# Altium PCB SFCslaver.PcbDoc (part 1 of 6)
Units mm, origin at the board's own origin, x right, y up, seen from the top; angles counter-clockwise.
Board outline 149.66 x 75.74 mm, 2 copper layers (Top Layer, Bottom Layer); 284 components, 212 nets, 830 pads, 310 vias.
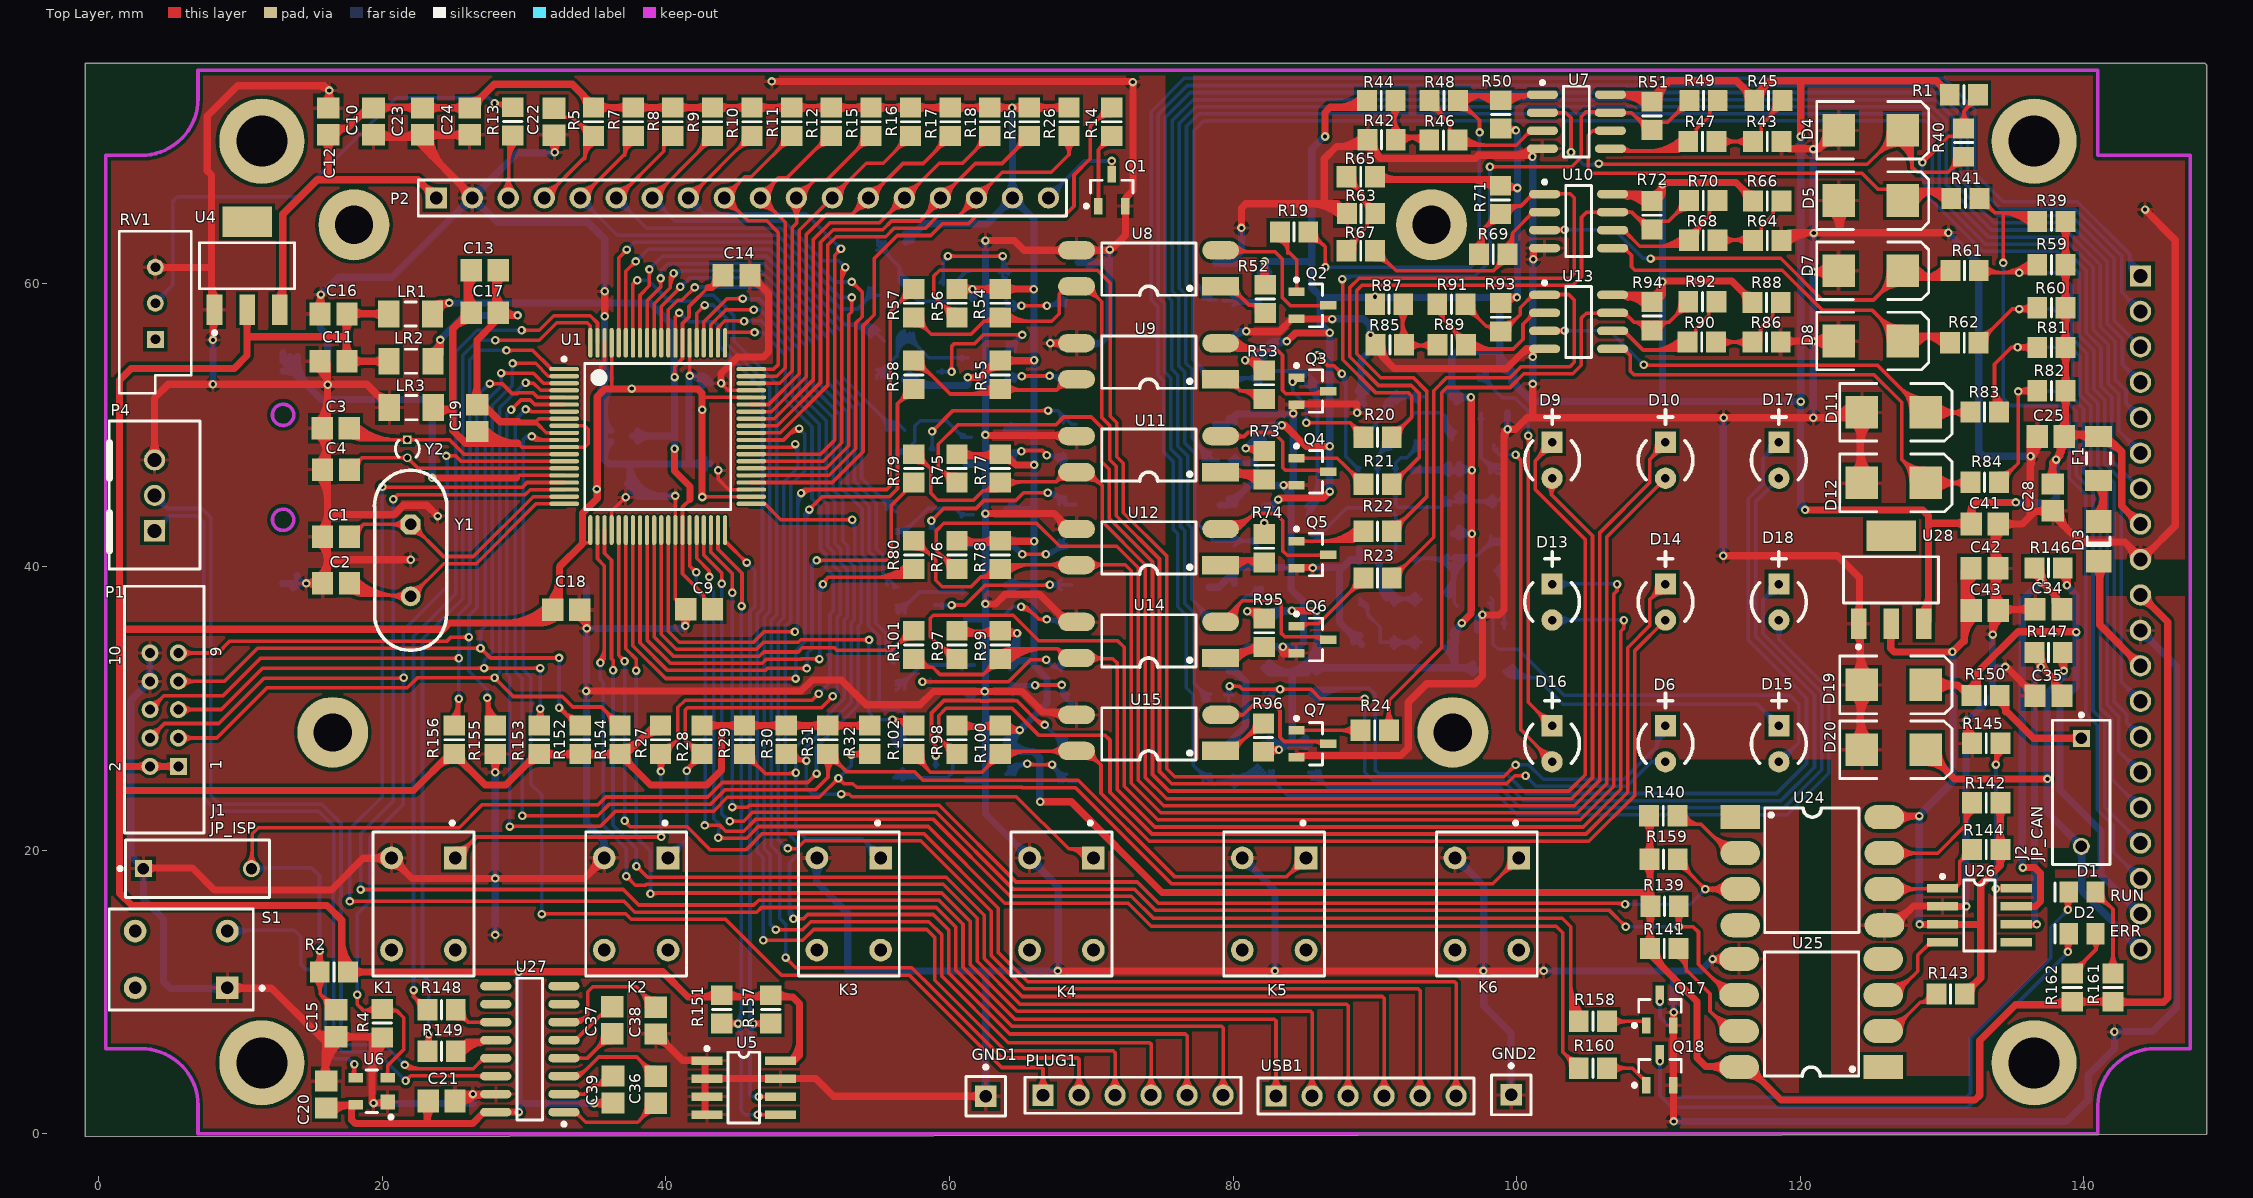
[diagram p0: Top Layer view]
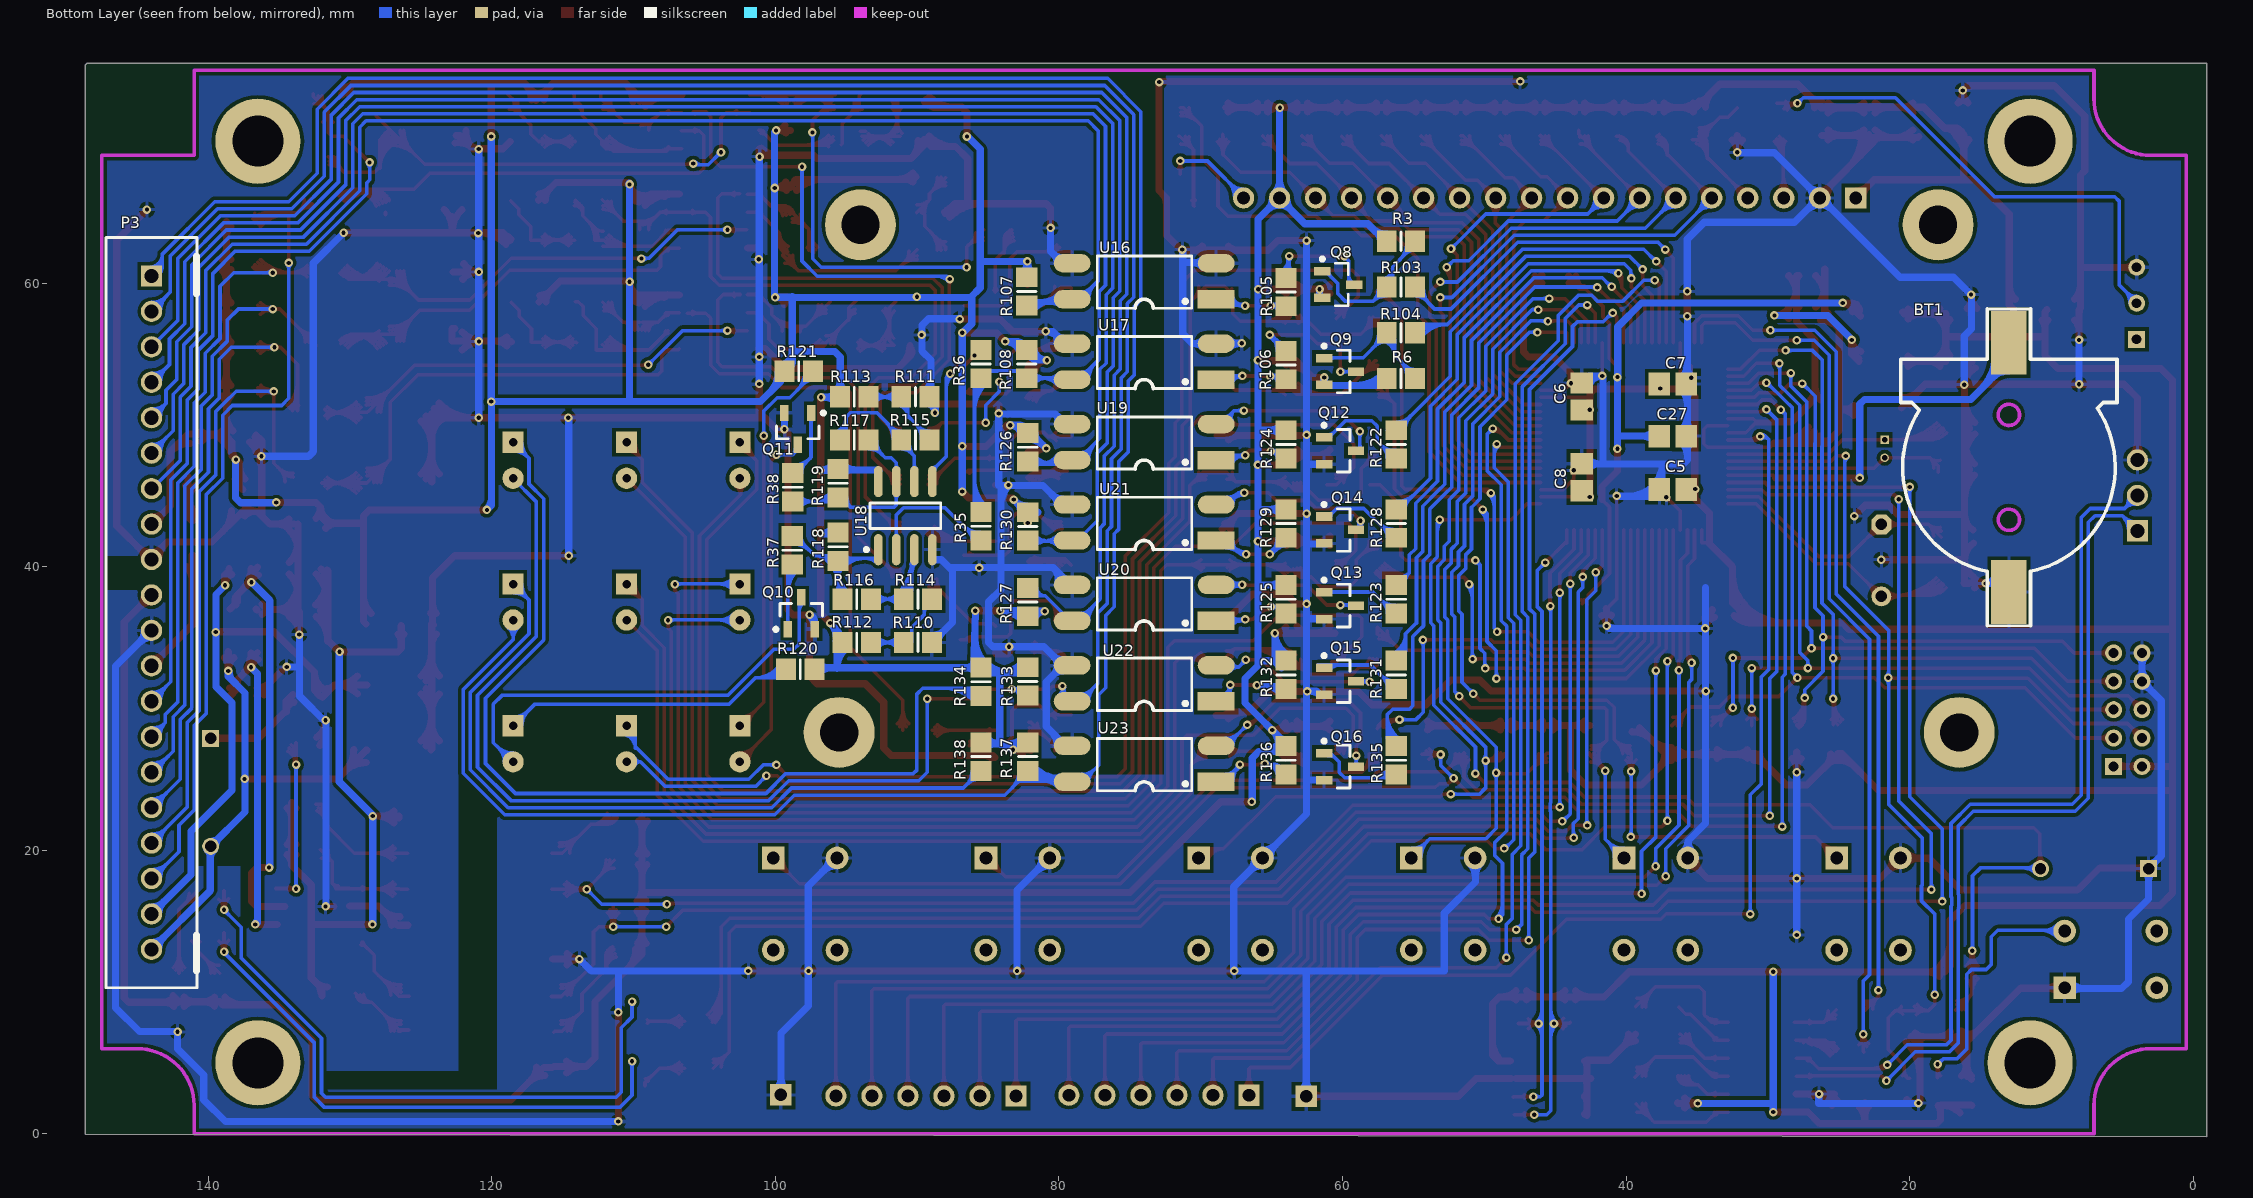
[diagram p1: Bottom Layer view, seen from below]

## Layer stack, top to bottom
Top Solder: solder mask 0.0102, Solder Resist, Dk 3.5
Top Layer: signal copper 0.0356
Dielectric1: dielectric 0.32, FR-4, Dk 4.8
Bottom Layer: signal copper 0.0356
Bottom Solder: solder mask 0.0102, Solder Resist, Dk 3.5

## Board outline
-0.968,-0.229 -0.968,75.514 148.537,75.514 148.588,75.463 148.689,75.362 148.689,-0.051

## Design rules (kind name [scope] priority, off if disabled: settings)
Clearance Clearance_U1 [(InComponent('U1'))] p1: gap=0.127
Clearance [All] p2: gap=0.245
HoleSize [All] p1: absolutevalues=TRUE maxlimit=5.08 minlimit=0.025 maxpercent=80.000 minpercent=20.000
PolygonConnect [All] p1: connectstyle=Relief reliefconductorwidth=0.254 reliefentries=4 polygonreliefangle="90 Angle" airgapwidth=0.254
RoutingVias [All] p1: holewidth=0.711 width=1.27 viastyle="Through Hole" minholewidth=0.711 minwidth=1.27 maxholewidth=0.711 maxwidth=1.27
SilkToSolderMaskClearance SilkscreenOverComponentPads [IsPad] p1: minsilkscreentomaskgap=0.254 clearancetoexposedcopper=TRUE
SolderMaskExpansion [All] p1: expansion=0.102
Width Width_NETJ2 [InNet('NetJ2_1')or InNet('NetJ2_2')] p1: maxlimit=0.508 minlimit=0.254 preferedwidth=0.508
Width Width_NETC35_2 [InNet('NetC35_2')] p2: maxlimit=0.508 minlimit=0.254 preferedwidth=0.508
Width Width_NETC34_2 [InNet('NetC34_2')] p3: maxlimit=0.508 minlimit=0.254 preferedwidth=0.508
Width Width_CANL_PORT1 [InNet('CANL_PORT1')] p4: maxlimit=0.508 minlimit=0.254 preferedwidth=0.508
Width Width_CANH_PORT1 [InNet('CANH_PORT1')] p5: maxlimit=0.508 minlimit=0.254 preferedwidth=0.508
Width Width_VREG [InNet('VREG')] p6: maxlimit=0.508 minlimit=0.254 preferedwidth=0.508
Width Width_VREFP [InNet('VREFP')] p7: maxlimit=0.508 minlimit=0.254 preferedwidth=0.508
Width Width_VDDA [InNet('VDDA')] p8: maxlimit=0.508 minlimit=0.254 preferedwidth=0.508
Width Width_AGND [InNet('AGND')] p9: maxlimit=0.508 minlimit=0.254 preferedwidth=0.508
Width Width_NetQ20_1 [InNet('NetQ20_1')] p10: maxlimit=0.508 minlimit=0.254 preferedwidth=0.508
Width Width_VBAT [InNet('VBAT')] p11: maxlimit=0.508 minlimit=0.254 preferedwidth=0.508
Width Width_NetD22_1 [InNet('NetD22_1')] p12: maxlimit=0.508 minlimit=0.254 preferedwidth=0.508
Width Width_NetD21_1 [InNet('NetD21_1')] p13: maxlimit=0.508 minlimit=0.254 preferedwidth=0.508
Width Width_BT1 [InNet('NetBT1_1')] p14: maxlimit=0.508 minlimit=0.254 preferedwidth=0.508
Width Width_Plus_Power [InNet('PLUS_POWER_PORT')] p15: maxlimit=0.508 minlimit=0.254 preferedwidth=0.508
Width Width_GNDA [InNet('GNDA')] p16: maxlimit=0.508 minlimit=0.254 preferedwidth=0.508
Width Width_GND [InNet('GND')] p17: maxlimit=0.508 minlimit=0.254 preferedwidth=0.508
Width Width_1V8 [InNet('1.8V')] p18: maxlimit=0.508 minlimit=0.254 preferedwidth=0.508
Width Width_3V3 [InNet('3.3V')] p19: maxlimit=0.508 minlimit=0.254 preferedwidth=0.508
Width Width_5VA [InNet('5VA')] p20: maxlimit=0.508 minlimit=0.254 preferedwidth=0.508
Width Width_5V [InNet('5V')] p21: maxlimit=0.508 minlimit=0.254 preferedwidth=0.508
Width Width_12V [InNet('12V') or InNet('NETD3_1')] p22: maxlimit=0.508 minlimit=0.254 preferedwidth=0.508
Width [All] p23: maxlimit=0.254 minlimit=0.254 preferedwidth=0.254
27 further rules are at their usual default settings.

## Classes and differential pairs
component class xcomm: C34 C35 C36 C37 C38 C39 C41 C42 C43 C74 C75 D19 D20 J2 P1 P3 P4 R139 R140 R141 R142 R143 R144 R145 R146 R147 R148 R149 R150 R152 R153 R154 R155 R156 R159 U24 U25 U26 U27 U28
component class output3: D1 D2 D17 D18 Q15 Q16 Q17 Q18 R125 R131 R132 R133 R134 R136 R137 R138 R158 R160 R161 R162 U22 U23
component class output2: Q12 Q13 Q14 R112 R123 R124 R125 R126 R127 R128 R129 R130 U19 U20 U21
component class output1: D15 D16 Q8 Q9 Q10 Q11 R3 R6 R35 R36 R37 R38 R96 R103 R104 R105 R107 R108 R110 R111 R112 R113 R114 R115 R116 R117 R118 R119 R120 R121 U16 U17 U18
component class input3: D11 D12 D13 D14 Q6 Q7 R23 R24 R72 R75 R81 R83 R84 R86 R87 R88 R89 R90 R91 R92 R93 R94 R95 R96 R97 R98 R99 R100 R101 R102 U13 U14 U15
component class input2: D7 D8 D9 D10 Q4 Q5 R21 R22 R59 R60 R61 R62 R63 R64 R65 R66 R67 R68 R69 R70 R71 R72 R73 R74 R75 R76 R77 R78 R79 R80 U10 U11 U12
component class input1: C25 C28 D3 D4 D5 D6 F1 Q2 Q3 R1 R19 R20 R29 R30 R31 R32 R38 R43 R44 R45 R46 R47 R49 R50 R51 R52 R53 R54 R55 R56 R57 R58 U7 U8 U9
component class cpu: BT1 C1 C2 C3 C4 C5 C6 C7 C8 C9 C10 C11 C12 C13 C14 C15 C16 C17 C18 C19 C20 C21 C22 C23 C24 C27 GND1 GND2 J1 K1 K2 K3 K4 K5 K6 LR1 LR2 LR3 P2 PLUG1 Q1 R2 R4 R5 R7 R8 R9 R10 R11 R12 R13 R14 R15 R16 R17 R18 R25 R26 R27 R28 R29 R30 R31 R32 R151 R157 RV1 S1 U1 U4 U5 U6 USB1 Y1 Y2

## Components (designator, comment, footprint, x,y, rotation, side; value= is the part's Value field where it differs from the comment)
BT1 "CR1220" BAT-CR1220A 13,47 r180 bottom locked
C1 "20pF" CAPC2012M 16.739,42.102 r180 top
C2 "20pF" CAPC2012M 16.739,38.829 r180 top
C3 "15pF" CAPC2012M 16.713,49.759 r180 top
C4 "15pF" CAPC2012M 16.739,46.838 r180 top
C5 "0.01uF" CAPC2012M 36.703,45.441 r180 bottom
C6 "0.01uF" CAPC2012M 43.129,51.994 r270 bottom
C7 "0.01uF" CAPC2012M 36.703,52.883 r0 bottom
C8 "0.01uF" CAPC2012M 43.129,46.304 r270 bottom
C9 "0.01uF" CAPC2012M 42.342,36.982 r0 top
C10 "10uF" CAPC2012M 19.38,71.399 r90 top
C11 "10uF" CAPC2012M 16.561,54.483 r0 top
C12 "0.1uF" CAPC2012M 16.18,71.399 r270 top
C13 "0.01uF" CAPC2012M 27.229,60.909 r0 top
C14 "0.01uF" CAPC2012M 44.983,60.554 r180 top
C15 "0.1uF" CAPC2012M 16.739,7.798 r270 top
C16 "0.1uF" CAPC2012M 16.561,57.81 r0 top
C17 "0.1uF" CAPC2012M 27.229,57.912 r0 top
C18 "0.01uF" CAPC2012M 32.969,36.957 r180 top
C19 "0.01uF" CAPC2012M 26.695,50.47 r90 top
C20 "0.1uF" CAPC2012M 16.053,2.769 r270 top
C21 "10uF" CAPC2012M 24.181,2.311 r180 top
C22 "0.1uF" CAPC2012M 32.107,71.378 r270 top
C23 "10uF" CAPC2012M 22.835,71.399 r90 top
C24 "0.1uF" CAPC2012M 26.162,71.399 r270 top
C25 "0.1uF" CAPC2012M 137.67,49.179 r0 top
C27 "0.01uF" CAPC2012M 36.703,49.2 r0 bottom
C28 "10uF" CAPC2012M 137.82,44.882 r90 top
C34 "20pF" CAPC2012M 137.517,36.987 r0 top
C35 "20pF" CAPC2012M 137.517,30.891 r0 top
C36 "0.1uF" CAPC2012M 39.294,3.099 r270 top
C37 "0.1uF" CAPC2012M 36.216,8.003 r270 top
C38 "0.1uF" CAPC2012M 39.29,7.977 r90 top
C39 "0.1uF" CAPC2012M 36.271,3.124 r270 top
C41 "0.1uF" CAPC2012M 133.01,43.002 r180 top
C42 "0.1uF" CAPC2012M 132.994,39.878 r180 top
C43 "10uF" CAPC2012M 133.02,36.906 r180 top
D1 "RUN" CD2012-0805 139.878,17.043 r180 top
D2 "ERR" CD2012-0805 139.878,14.097 r180 top
D3 "LL4148" CD3216-1206 141.046,41.783 r270 top
D4 "SMB12CA" SMB 124.97,70.769 r0 top
D5 "SMB12CA" SMB 124.97,65.816 r0 top
D6 "Green LED" LED254A 110.5,27.5 r270 top locked
D7 "SMB12CA" SMB 124.97,60.863 r0 top
D8 "SMB12CA" SMB 124.97,55.91 r0 top
D9 "Green LED" LED254A 102.5,47.5 r270 top locked
D10 "Green LED" LED254A 110.5,47.5 r270 top locked
D11 "SMB12CA" SMB 126.595,50.88 r0 top
D12 "SMB12CA" SMB 126.595,45.902 r0 top
D13 "Green LED" LED254A 102.5,37.5 r270 top locked
D14 "Green LED" LED254A 110.5,37.5 r270 top locked
D15 "Green LED" LED254A 118.5,27.5 r270 top locked
D16 "Red LED" LED254A 102.5,27.5 r270 top locked
D17 "Red LED" LED254A 118.5,47.5 r270 top locked
D18 "Red LED" LED254A 118.5,37.5 r270 top locked
D19 "SMB5.0CA" SMB 126.595,31.653 r0 top
D20 "SMB5.0CA" SMB 126.595,27.081 r0 top
F1 "50mA/60V" RESC3216M 141.046,47.625 r90 top
GND1 "Plug" PIN1 62.56,2.642 r0 top
GND2 "Plug" PIN1 99.619,2.743 r0 top
J1 "JP_ISP" DS-01 6.96,18.694 r0 top
J2 "JP_CAN" DS-01 139.827,24.079 r270 top
K1 "SW-PB" PBST-4S 22.9,16.2 r270 top locked
K2 "SW-PB" PBST-4S 37.9,16.2 r270 top locked
K3 "SW-PB" PBST-4S 52.9,16.2 r270 top locked
K4 "SW-PB" PBST-4S 67.9,16.2 r270 top locked
K5 "SW-PB" PBST-4S 82.9,16.2 r270 top locked
K6 "SW-PB" PBST-4S 97.9,16.2 r270 top locked
LR1 "CBG321609U102" RESC3216M 21.996,57.81 r0 top
LR2 "CBG321609U102" RESC3216M 22.022,54.483 r0 top
LR3 "CBG321609U102" RESC3216M 22.047,51.206 r0 top
P1 "Header 5X2" HDR2X5M 5.613,25.908 r90 top
P2 "Header 18" HDR1X18 23.8,66 r0 top locked
P3 "Header 20" HDR1X20-2.5 144,60.5 r270 bottom locked
P4 "Header 3" HDR1X3-2.5 3.937,42.52 r90 top
PLUG1 "Header 6" HDR1X6 66.599,2.718 r0 top
Q1 "SS8050" SOT-23_N 71.45,66.548 r90 top
Q2 "SS8050" SOT-23_N 85.598,58.42 r0 top
Q3 "SS8050" SOT-23_N 85.598,52.379 r0 top
Q4 "SS8050" SOT-23_N 85.598,46.697 r0 top
Q5 "SS8050" SOT-23_N 85.598,40.847 r0 top
Q6 "SS8050" SOT-23_N 85.598,34.853 r0 top
Q7 "SS8050" SOT-23_N 85.598,27.494 r0 top
Q8 "SS8550" SOT-23_N 60.3,59.893 r180 bottom
Q9 "SS8550" SOT-23_N 60.174,53.758 r180 bottom
Q10 "SS8050" SOT-23_N 98.171,36.703 r90 bottom
Q11 "SS8050" SOT-23_N 98.421,49.712 r270 bottom
Q12 "SS8050" SOT-23_N 60.174,48.17 r180 bottom
Q13 "SS8050" SOT-23_N 60.174,37.248 r180 bottom
Q14 "SS8050" SOT-23_N 60.174,42.582 r180 bottom
Q15 "SS8050" SOT-23_N 60.174,31.914 r180 bottom
Q16 "SS8050" SOT-23_N 60.174,25.894 r180 bottom
Q17 "SS8050" SOT-23_N 110.109,8.763 r90 top
Q18 "SS8050" SOT-23_N 110.109,4.547 r90 top
R1 "100K" RESC2012M 131.547,73.279 r180 top
R2 "10K" RESC2012M 16.586,11.405 r180 top
R3 "3K" RESC2012M 55.88,62.941 r180 bottom
R4 "100K" RESC2012M 19.99,7.798 r270 top
R5 "10K" RESC2012M 34.901,71.378 r270 top
R6 "3K" RESC2012M 55.88,53.264 r180 bottom
R7 "10K" RESC2012M 37.695,71.378 r270 top
R8 "10K" RESC2012M 40.489,71.378 r270 top
R9 "10K" RESC2012M 43.283,71.378 r270 top
R10 "10K" RESC2012M 46.077,71.378 r270 top
R11 "10K" RESC2012M 48.871,71.378 r270 top
R12 "10K" RESC2012M 51.665,71.378 r270 top
R13 "3K" RESC2012M 29.208,71.399 r270 top
R14 "1K" RESC2012M 71.45,71.374 r270 top
R15 "10K" RESC2012M 54.459,71.378 r270 top
R16 "10K" RESC2012M 57.253,71.378 r270 top
R17 "10K" RESC2012M 60.047,71.378 r270 top
R18 "10K" RESC2012M 62.841,71.378 r270 top
R19 "1K" RESC2012M 84.303,63.602 r180 top
R20 "1K" RESC2012M 90.195,49.117 r180 top
R21 "1K" RESC2012M 90.195,45.809 r180 top
R22 "1K" RESC2012M 90.195,42.501 r180 top
R23 "1K" RESC2012M 90.195,39.192 r180 top
R24 "1K" RESC2012M 89.992,28.448 r180 top
R25 "10K" RESC2012M 65.635,71.378 r270 top
R26 "10K" RESC2012M 68.429,71.378 r270 top
R27 "10K" RESC2012M 39.624,27.792 r90 top
R28 "10K" RESC2012M 42.545,27.792 r90 top
R29 "10K" RESC2012M 45.542,27.792 r90 top
R30 "10K" RESC2012M 48.489,27.792 r90 top
R31 "10K" RESC2012M 51.41,27.792 r90 top
R32 "10K" RESC2012M 54.381,27.792 r90 top
R35 "51K" RESC2012M 85.496,42.85 r270 bottom
R36 "51K" RESC2012M 85.496,54.28 r270 bottom (schematic designator R46)
R37 "10K" RESC2012M 98.806,41.148 r90 bottom
R38 "10K" RESC2012M 98.781,45.593 r90 bottom
R39 "100K" RESC2012M 137.721,64.342 r0 top
R40 "10K" RESC2012M 131.521,69.901 r90 top
R41 "10K" RESC2012M 131.65,65.968 r0 top
R42 "100K" RESC2012M 90.475,70.104 r0 top
R43 "100K" RESC2012M 117.68,69.981 r180 top
R44 "51K" RESC2012M 90.449,72.873 r180 top
R45 "51K" RESC2012M 117.756,72.877 r180 top
R46 "100K" RESC2012M 94.841,70.079 r0 top
R47 "100K" RESC2012M 113.108,69.981 r180 top
R48 "1M" RESC2012M 94.867,72.873 r180 top
R49 "1M" RESC2012M 113.184,72.877 r180 top
R50 "4.7K" RESC2012M 98.884,71.886 r90 top
R51 "4.7K" RESC2012M 109.548,71.78 r90 top
R52 "1K" RESC2012M 82.271,58.877 r270 top
R53 "1K" RESC2012M 82.194,52.829 r270 top
R54 "4.7K" RESC2012M 63.578,58.577 r90 top
R55 "4.7K" RESC2012M 63.578,53.522 r90 top
R56 "3K" RESC2012M 60.53,58.577 r270 top
R57 "470R" RESC2012M 57.482,58.577 r90 top
R58 "470R" RESC2012M 57.482,53.522 r270 top
R59 "100K" RESC2012M 137.721,61.294 r0 top
R60 "100K" RESC2012M 137.721,58.246 r0 top
R61 "10K" RESC2012M 131.597,60.884 r0 top
R62 "10K" RESC2012M 131.572,55.778 r0 top
R63 "100K" RESC2012M 89.027,64.897 r0 top
R64 "100K" RESC2012M 117.68,62.996 r180 top
R65 "51K" RESC2012M 89.002,67.488 r0 top
R66 "51K" RESC2012M 117.68,65.79 r180 top
R67 "100K" RESC2012M 89.002,62.281 r180 top
R68 "100K" RESC2012M 113.159,63.022 r180 top
R69 "1M" RESC2012M 98.349,62.027 r180 top
R70 "1M" RESC2012M 113.159,65.816 r180 top
R71 "4.7K" RESC2012M 98.857,65.862 r270 top
R72 "4.7K" RESC2012M 109.552,64.774 r90 top
R73 "1K" RESC2012M 82.194,47.147 r90 top
R74 "1K" RESC2012M 82.194,41.297 r270 top
R75 "3K" RESC2012M 60.53,46.918 r270 top
R76 "3K" RESC2012M 60.53,40.822 r270 top
R77 "4.7K" RESC2012M 63.578,46.918 r90 top
R78 "4.7K" RESC2012M 63.578,40.822 r90 top
R79 "470R" RESC2012M 57.482,46.918 r270 top
R80 "470R" RESC2012M 57.482,40.822 r270 top
R81 "100K" RESC2012M 137.721,55.452 r0 top
R82 "100K" RESC2012M 137.721,52.404 r0 top
R83 "10K" RESC2012M 133.01,50.902 r0 top
R84 "10K" RESC2012M 133.01,45.949 r0 top
R85 "100K" RESC2012M 91.059,55.651 r0 top
R86 "100K" RESC2012M 117.629,55.833 r180 top
R87 "51K" RESC2012M 91.008,58.496 r180 top
R88 "51K" RESC2012M 117.629,58.627 r180 top
R89 "100K" RESC2012M 95.428,55.651 r180 top
R90 "100K" RESC2012M 113.057,55.833 r180 top
R91 "1M" RESC2012M 95.402,58.496 r0 top
R92 "1M" RESC2012M 113.108,58.678 r180 top
R93 "4.7K" RESC2012M 98.884,57.586 r270 top
R94 "4.7K" RESC2012M 109.552,57.662 r90 top
R95 "1K" RESC2012M 82.194,35.328 r270 top
R96 "1K" RESC2012M 82.144,27.94 r90 top
R97 "3K" RESC2012M 60.53,34.472 r270 top
R98 "3K" RESC2012M 60.53,27.792 r270 top
R99 "4.7K" RESC2012M 63.578,34.472 r90 top
R100 "4.7K" RESC2012M 63.578,27.792 r90 top
R101 "470R" RESC2012M 57.482,34.472 r90 top
R102 "470R" RESC2012M 57.482,27.792 r90 top
R103 "10K" RESC2012M 55.88,59.715 r0 bottom
R104 "10K" RESC2012M 55.88,56.49 r0 bottom
R105 "470R" RESC2012M 63.984,59.364 r270 bottom
R106 "470R" RESC2012M 63.984,54.208 r270 bottom
R107 "10K" RESC2012M 82.271,59.411 r90 bottom
R108 "10K" RESC2012M 82.271,54.28 r90 bottom
R110 "100K" RESC2012M 89.943,34.65 r0 bottom
R111 "100K" RESC2012M 90.121,51.973 r0 bottom
R112 "51K" RESC2012M 94.261,34.65 r0 bottom
R113 "51K" RESC2012M 94.439,51.973 r0 bottom
R114 "100K" RESC2012M 89.943,37.698 r180 bottom
R115 "100K" RESC2012M 90.121,48.925 r180 bottom
R116 "1M" RESC2012M 94.261,37.698 r0 bottom
R117 "1M" RESC2012M 94.439,48.925 r180 bottom
R118 "4.7K" RESC2012M 95.58,41.402 r270 bottom
R119 "4.7K" RESC2012M 95.58,45.872 r270 bottom
R120 "10K" RESC2012M 98.247,32.766 r180 bottom
R121 "10K" RESC2012M 98.349,53.772 r0 bottom
R122 "1K" RESC2012M 56.212,48.62 r270 bottom
R123 "1K" RESC2012M 56.212,37.698 r270 bottom
R124 "470R" RESC2012M 63.984,48.62 r270 bottom
R125 "470R" RESC2012M 63.984,37.698 r270 bottom
R126 "10K" RESC2012M 82.194,48.417 r90 bottom
R127 "10K" RESC2012M 82.194,37.495 r270 bottom
R128 "1K" RESC2012M 56.212,43.032 r270 bottom
R129 "470R" RESC2012M 63.984,43.032 r270 bottom
R130 "10K" RESC2012M 82.194,42.829 r90 bottom
R131 "1K" RESC2012M 56.212,32.364 r270 bottom
R132 "470R" RESC2012M 63.984,32.364 r270 bottom
R133 "10K" RESC2012M 82.194,31.902 r90 bottom
R134 "10K" RESC2012M 85.496,31.881 r270 bottom
R135 "1K" RESC2012M 56.212,26.344 r270 bottom
R136 "470R" RESC2012M 63.984,26.344 r270 bottom
R137 "10K" RESC2012M 82.194,26.594 r90 bottom
R138 "10K" RESC2012M 85.496,26.594 r270 bottom
R139 "4.7K" RESC2012M 110.439,16.053 r0 top
R140 "470R" RESC2012M 110.338,22.428 r180 top
R141 "4.7K" RESC2012M 110.414,13.056 r0 top
R142 "4.7K" RESC2012M 133.121,23.343 r180 top
R143 "470R" RESC2012M 130.607,9.855 r0 top
R144 "4.7K" RESC2012M 133.121,20.041 r180 top
R145 "4.7K" RESC2012M 133.121,27.534 r0 top
R146 "5.1R" RESC2012M 137.517,39.903 r180 top
R147 "5.1R" RESC2012M 137.517,33.939 r180 top
R148 "470R" RESC2012M 24.181,8.738 r0 top
R149 "470R" RESC2012M 24.181,5.817 r0 top
R150 "120R" RESC2012M 133.071,30.912 r180 top
R151 "10K" RESC2012M 43.942,8.763 r90 top
R152 "10K" RESC2012M 33.96,27.788 r270 top
R153 "10K" RESC2012M 31.064,27.788 r270 top
R154 "10K" RESC2012M 36.763,27.792 r270 top
R155 "10K" RESC2012M 27.965,27.788 r270 top
R156 "10K" RESC2012M 25.07,27.788 r270 top
R157 "10K" RESC2012M 47.396,8.763 r270 top
R158 "1K" RESC2012M 105.386,7.925 r0 top
R159 "10K" RESC2012M 110.363,19.355 r0 top
R160 "1K" RESC2012M 105.386,4.627 r0 top
R161 "4.7K" RESC2012M 142.062,10.312 r90 top
R162 "4.7K" RESC2012M 139.192,10.311 r90 top
RV1 "10K" VR5S 3.988,58.572 r90 top
S1 "SW-PB" DPST-4S 5.817,12.294 r180 top
U1 "LPC1758" LQFP80_M 39.423,49.179 r0 top locked
U4 "ASM1117-3.3" SOT-223 10.465,61.214 r0 top
U5 "FM24CL04-GTR" SO-8 45.491,3.251 r270 top
U6 "MIC811TU" SOT143_N 19.253,2.997 r180 top
U7 "LM293D" SO8_N 104.218,71.378 r0 top
U8 "EL817C" SO-4LA 79.123,59.77 r180 top
U9 "EL817C" SO-4LA 79.123,53.216 r180 top
U10 "LM293D" SO8_N 104.37,64.368 r0 top
U11 "EL817C" SO-4LA 79.123,46.662 r180 top
U12 "EL817C" SO-4LA 79.123,40.108 r180 top
U13 "LM293D" SO8_N 104.37,57.256 r0 top
U14 "EL817C" SO-4LA 79.123,33.554 r180 top
U15 "EL817C" SO-4LA 79.123,27 r180 top
U16 "EL817C" SO-4LA 68.912,58.856 r0 bottom
U17 "EL817C" SO-4LA 68.912,53.183 r0 bottom
U18 "LM293D" SO8_N 90.832,43.591 r90 bottom
U19 "EL817C" SO-4LA 68.912,47.511 r0 bottom
U20 "EL817C" SO-4LA 68.912,36.165 r0 bottom
U21 "EL817C" SO-4LA 68.912,41.838 r0 bottom
U22 "EL817C" SO-4LA 68.912,30.493 r0 bottom
U23 "EL817C" SO-4LA 68.912,24.82 r0 bottom
U24 "6N137" SO-8LA 115.773,22.327 r0 top
U25 "6N137" SO-8LA 125.857,4.699 r180 top
U26 "PCA82C250/251" SO8 132.639,15.392 r270 top
U27 "MAX3232ESE" NSO16_N 30.404,5.969 r180 top
U28 "LM1117-5.0" SOT-223 126.416,39.065 r0 top
USB1 "Header 6" HDR1X6 83.033,2.664 r0 top
Y1 "12MHz@20pF" HC_SOC 21.996,40.437 r270 top
Y2 "32.768Hz@15pF" HC-RTC 21.768,48.311 r270 top

## Footprints (in the part's own frame and the unit in brackets; to place one, negate y for a bottom-side part, rotate by r counter-clockwise, add the part's x,y. Pads: shape width x height; smd on the part's side, far side on the other; paste and mask are expansions set on the pad)
BAT-CR1220A [mm] "Battery holder, Body 12.5 x 6mm (Dia.xH max);"
  rect 2.5x4.5 smd: 1(0,8.8) 2(0,-8.8)
  Keep-Out Layer circle w0.254: c0,3.7 r0.75
  Keep-Out Layer circle w0.254: c0,-3.7 r0.75
  silkscreen extent -7.62,-11.18 7.62,11.18
CAPC2012M [mm] "Chip Capacitor, Body 2.0x1.3mm, IPC Low Density"
  rect 1.5x1.6 smd: 1(-0.95,0) 2(0.95,0)
  body extent -1.1,-0.72 1.1,0.72, height 1.1
CD2012-0805 [mm] "Chip Diode; Body 2.0 x 1.3 mm (LxW typ)"
  rect 1.3x1.5 smd: 1(-0.95,0) 2(0.95,0)
  silkscreen extent 1.9,-0.65 1.9,0.65
CD3216-1206 [mm] "Chip Diode; Body 3.2 x 1.6 mm (LxW typ)"
  rect 1.6x1.8 smd: 1(-1.4,0) 2(1.4,0)
  silkscreen extent -0.3,-0.8 0.3,0.8
DPST-4S [mm] "Double-Pole, Single-Throw Switch; 4 Leads;Pitch 6mm"
  rect 1.6x1.6 hole 0.9: 1(-3.25,2)
  round 1.6 hole 0.9: 2(-3.25,-2) 3(3.25,-2) 4(3.25,2)
  silkscreen extent -5.84,-3.56 5.08,3.56
DS-01 [mm] "Dial switch 2 Leads, body 3.91mm(L)x10.0mm(W)x6.6mm(H),pitch 7.62mm"
  rect 1.2x1.2 hole 0.8: 1(-3.81,0)
  round 1.2 hole 0.8: 2(3.81,0)
  silkscreen extent -5.58,-2.03 5.08,2.03
HC-RTC [mm] "Crystal,, Radial, Tantalum; Body 3 x 8 mm (Dia.xH max); Pin Spacing 1.27 mm (typ)"
  rect 0.6x0.6 hole 0.4: 1(-0.635,0)
  round 0.6 hole 0.4: 2(0.635,0)
  silkscreen extent -0.6,-0.85 0.6,0.85
HC_SOC [mm] "Quartz Crystal, Thru-Hole; 2 Leads; Pitch=5.08mm"
  oct 1.4x1.4 hole 0.8: 1(-2.54,0)
  round 1.4 hole 0.8: 2(2.54,0)
  silkscreen extent -6.36,-2.55 6.35,2.55
HDR1X3-2.5 [mm] "Connector; Header; 3Position;Pitch 2.5mm"
  rect 1.5x1.5 hole 1: 1(0,0)
  round 1.5 hole 1: 2(2.5,0) 3(5,0)
  silkscreen extent -2.7,-3.2 7.75,3.2
HDR1X6 [mm] "Connector; Header; 6 Position"
  rect 1.5x1.5 hole 0.9: 1(0,0)
  round 1.5 hole 0.9: 2(2.54,0) 3(5.08,0) 4(7.62,0) 5(10.16,0) 6(12.7,0)
  silkscreen extent -1.27,-1.27 13.97,1.27
HDR1X18 [mm] "Connector; Header; 18 Position"
  rect 1.5x1.5 hole 0.9: 1(0,0)
  round 1.5 hole 0.9: 2(2.54,0) 3(5.08,0) 4(7.62,0) 5(10.16,0) 6(12.7,0) 7(15.24,0) 8(17.78,0) 9(20.32,0) 10(22.86,0) 11(25.4,0) 12(27.94,0) 13(30.48,0) 14(33.02,0) 15(35.56,0) 16(38.1,0) 17(40.64,0) 18(43.18,0)
  silkscreen extent -1.27,-1.27 44.45,1.27
HDR1X20-2.5 [mm] "Connector; Header; 20 Position;Pitch 2.5mm"
  rect 1.5x1.5 hole 1: 1(0,0)
  round 1.5 hole 1: 2(2.5,0) 3(5,0) 4(7.5,0) 5(10,0) 6(12.5,0) 7(15,0) 8(17.5,0) 9(20,0) 10(22.5,0) 11(25,0) 12(27.5,0) 13(30,0) 14(32.5,0) 15(35,0) 16(37.5,0) 17(40,0) 18(42.5,0) 19(45,0) 20(47.5,0)
  silkscreen extent -2.7,-3.2 50.2,3.2
HDR2X5M [mm] "Connector; Header; 5x2 Position;Pitch 2mm"
  rect 1.2x1.2 hole 0.7: 1(0,0)
  round 1.2 hole 0.7: 2(0,2) 3(2,0) 4(2,2) 5(4,0) 6(4,2) 7(6,0) 8(6,2) 9(8,0) 10(8,2)
  silkscreen extent -4.7,-1.8 12.7,3.8
LED254A [mm] "Thru-Hole; 2 Leads; Pitch 2.54mm Body 4 x 8.2 mm (BottomxHigh)"
  rect 1.5x1.5 hole 0.6: 1(-1.27,0)
  round 1.5 hole 0.6: 2(1.27,0)
  silkscreen extent -3.56,-1.93 1.37,1.93
LQFP80_M [mm] "Thin QFP, 80-Leads, Body 12x12mm, Pitch 0.5mm, IPC Low Density"
  oval 2.1x0.3 smd: 1(-6.6,4.75) 2(-6.6,4.25) 3(-6.6,3.75) 4(-6.6,3.25) 5(-6.6,2.75) 6(-6.6,2.25) 7(-6.6,1.75) 8(-6.6,1.25) 9(-6.6,0.75) 10(-6.6,0.25) 11(-6.6,-0.25) 12(-6.6,-0.75) 13(-6.6,-1.25) 14(-6.6,-1.75) 15(-6.6,-2.25) 16(-6.6,-2.75) 17(-6.6,-3.25) 18(-6.6,-3.75) 19(-6.6,-4.25) 20(-6.6,-4.75) 41(6.6,-4.75) 42(6.6,-4.25) 43(6.6,-3.75) 44(6.6,-3.25) 45(6.6,-2.75) 46(6.6,-2.25) 47(6.6,-1.75) 48(6.6,-1.25) 49(6.6,-0.75) 50(6.6,-0.25) 51(6.6,0.25) 52(6.6,0.75) 53(6.6,1.25) 54(6.6,1.75) 55(6.6,2.25) 56(6.6,2.75) 57(6.6,3.25) 58(6.6,3.75) 59(6.6,4.25) 60(6.6,4.75)
  oval 0.3x2.1 smd: 21(-4.75,-6.6) 22(-4.25,-6.6) 23(-3.75,-6.6) 24(-3.25,-6.6) 25(-2.75,-6.6) 26(-2.25,-6.6) 27(-1.75,-6.6) 28(-1.25,-6.6) 29(-0.75,-6.6) 30(-0.25,-6.6) 31(0.25,-6.6) 32(0.75,-6.6) 33(1.25,-6.6) 34(1.75,-6.6) 35(2.25,-6.6) 36(2.75,-6.6) 37(3.25,-6.6) 38(3.75,-6.6) 39(4.25,-6.6) 40(4.75,-6.6) 61(4.75,6.6) 62(4.25,6.6) 63(3.75,6.6) 64(3.25,6.6) 65(2.75,6.6) 66(2.25,6.6) 67(1.75,6.6) 68(1.25,6.6) 69(0.75,6.6) 70(0.25,6.6) 71(-0.25,6.6) 72(-0.75,6.6) 73(-1.25,6.6) 74(-1.75,6.6) 75(-2.25,6.6) 76(-2.75,6.6) 77(-3.25,6.6) 78(-3.75,6.6) 79(-4.25,6.6) 80(-4.75,6.6)
  silkscreen extent -6.72,-5.15 5.15,5.57, body extent -6,-6 6,6, height 1.6
NSO16_N [mm] "SOIC, 16-Leads, Body 9.9x3.9mm, Pitch 1.27mm, IPC Medium Density"
  oval 2.2x0.6 smd: 1(-2.4,4.445) 2(-2.4,3.175) 3(-2.4,1.905) 4(-2.4,0.635) 5(-2.4,-0.635) 6(-2.4,-1.905) 7(-2.4,-3.175) 8(-2.4,-4.445) 9(2.4,-4.445) 10(2.4,-3.175) 11(2.4,-1.905) 12(2.4,-0.635) 13(2.4,0.635) 14(2.4,1.905) 15(2.4,3.175) 16(2.4,4.445)
  silkscreen extent -2.53,-5 0.9,5.42, body extent -2,-5 2,5, height 1.75
PBST-4S [mm] "Double-Pole, Single-Throw Switch; 4 Leads;Pitch 6mm,Body=6mmx6mm"
  rect 1.6x1.6 hole 0.9: 1(-3.25,2.25)
  round 1.6 hole 0.9: 2(-3.25,-2.25) 3(3.25,-2.25) 4(3.25,2.25)
  silkscreen extent -5.84,-3.56 5.08,3.56
PIN1 [mm] "Connector; Plug"
  rect 1.5x1.5 hole 0.9: 1(0,0)
  silkscreen extent -1.4,-1.4 1.4,2.17
RESC2012M [mm] "Chip Resistor, Body 2.0x1.3mm, IPC Low Density"
  rect 1.4x1.5 smd: 1(-1,0) 2(1,0)
  silkscreen extent 0,-0.65 0,0.65, body extent -1.07,-0.7 1.07,0.7, height 0.65
RESC3216M [mm] "Chip Resistor, Body 3.2x1.6mm, IPC Low Density"
  rect 1.5x1.9 smd: 1(-1.55,0) 2(1.55,0)
  silkscreen extent -0.4,-0.85 0.4,0.85, body extent -1.68,-0.87 1.68,0.87, height 0.71
SMB [mm] "DO-214-AA/SMB; 2 C-Bend Leads; Body 5.3 x 3.6 mm, inc. leads (LxW)"
  rect 2.3x2.3 smd: 1(-2.25,0) 2(2.25,0)
  silkscreen extent -3.8,-2.03 4.1,2.03
SO8 [mm] "Small Outline; 8 Leads; Body Width 3.9 mm; Pitch 1.27 mm"
  rect 0.6x2.2 smd: 1(-1.905,-2.6) 2(-0.635,-2.6) 3(0.635,-2.6) 4(1.905,-2.6) 5(1.905,2.6) 6(0.635,2.6) 7(-0.635,2.6) 8(-1.905,2.6)
  silkscreen extent -2.88,-2.72 2.5,1.1
SO8_N [mm] "SOIC, 8-Leads, Body 4.9x3.9mm, Pitch 1.27mm, IPC Medium Density"
  oval 2.2x0.6 smd: 1(-2.4,1.905) 2(-2.4,0.635) 3(-2.4,-0.635) 4(-2.4,-1.905) 5(2.4,-1.905) 6(2.4,-0.635) 7(2.4,0.635) 8(2.4,1.905)
  silkscreen extent -2.52,-2.5 0.9,2.88, body extent -1.95,-2.45 1.95,2.45, height 1.75
SO-4LA [mm] "body=6.5mmx4.58mm(LxW),pitch=2.54mm"
  rect 2.6x1.3 smd: 1(0,0)
  oval 2.6x1.3 smd: 2(0,-2.54) 3(10.16,-2.54) 4(10.16,0)
  silkscreen extent 1.72,-3.05 8.38,0.64
SO-8 [mm] "Small Outline; 8 Leads; Body Width 3.9 mm; Pitch 1.27 mm"
  rect 0.6x2.2 smd: 1(-1.905,-2.6) 2(-0.635,-2.6) 3(0.635,-2.6) 4(1.905,-2.6) 5(1.905,2.6) 6(0.635,2.6) 7(-0.635,2.6) 8(-1.905,2.6)
  silkscreen extent -2.88,-2.72 2.5,1.1
SO-8LA [mm] "body=6.5mmx4.58mm(LxW),pitch=2.54mm"
  rect 2.8x1.7 smd: 1(0,0)
  oval 2.8x1.7 smd: 2(0,-2.54) 3(0,-5.08) 4(0,-7.62) 5(10.16,-7.62) 6(10.16,-5.08) 7(10.16,-2.54) 8(10.16,0)
  silkscreen extent 1.72,-8.13 8.38,0.64
SOT143_N [mm] "SOT143, 4-Leads, Body 2.9x1.3mm, Pitch 1.9mm, Lead Span 2.3mm, IPC Medium Density"
  rect 1x1.05 smd: 1(-1.125,0.75)
  rect 1x0.65 smd: 2(-1.125,-0.95) 3(1.125,-0.95) 4(1.125,0.95)
  silkscreen extent -1.48,-1.5 0.4,1.95, body extent -0.7,-1.52 0.7,1.52, height 1.2
SOT-23_N [mm] "SOT23, 3-Leads, Body 2.9x1.3mm, Pitch 0.95mm, Lead Span 2.5mm, IPC Medium Density"
  rect 1.15x0.6 smd: 1(-1.125,0.95) 2(-1.125,-0.95) 3(1.125,0)
  silkscreen extent -1.25,-1.5 0.7,1.92, body extent -0.7,-1.5 0.7,1.5, height 1.1
SOT-223 [mm] "SOT-223/SC-73; 4 Leads; Body 6.7 x 7.3 mm, inc. leads (LxW max)"
  rect 1.1x2.15 smd: 1(-2.3,-3.1) 2(0,-3.1) 3(2.3,-3.1)
  rect 3.5x2.15 smd: 4(0,3.1)
  silkscreen extent -3.35,-4.85 3.35,1.63
VR5S [mm] "Potentiometer; 3 Leads"
  rect 1.2x1.2 hole 0.7: 1(-2.54,0)
  round 1.2 hole 0.7: 2(0,0) 3(2.54,0)
  silkscreen extent -6.35,-2.54 5.08,2.54

## Part data
BT1: library part Battery, "Battery holder"
C1 C2 C3 C4 C5 C6 C7 C8 C9 C10 C11 C12 C13 C14 C15 C16 C17 C18 C19 C20 C21 C22 C23 C24 C25 C27 C28 C34 C35 C36 C37 C38 C39 C41 C42 C43: library part Cap, "Capacitor"
D1: library part LED1, "Green LED,Can bus indicator for run status."
D2: library part LED1, "Red LED,Can bus indicator for err status."
D3: library part "Diode 1N4007", "1 Amp General Purpose Rectifier"
D4 D5 D7 D8 D11 D12 D19 D20: library part "Bi-dir TVS Diode", "Bi-dir TVS Diode"
D6 D9 D10 D13 D14 D15: library part LED1, "Green LED ,SIP, Dia =3mm"
D16 D17 D18: library part LED1, "Red LED ,SIP, Dia =3mm"
F1: library part "Fuse Thermal", "Thermal Fuse"
J1: library part JK2H, "Dial Switch pitch 7.62mm"
J2: library part JK2H, "'Dial Switch pitch 7.62mm"
K1 K2 K3 K4 K5 K6: "Push Button ,6mm(L)x6mm(W)x22mm(H)"
LR1 LR2 LR3: library part BLM10/11/21/31/41, "EMI FILTERS,DC Resistance max.0.05~1.5 ohms,10 ~ 1000 ohms at 100MHz  Frequency"
P1: "Header, 5-Pin, Dual row,Pitch 2mm"
P2: library part "Header 18H", "'Female Header,Single Row Straight, 20-Pin,Pitch 2.54mm,black"
P3: "'Wafer Header, 20-Pin,white"
P4: "'Wafer Header, 3-Pin,white"
PLUG1 USB1: "Header, 6-Pin"
Q1 Q2 Q3 Q4 Q5 Q6 Q7 Q10 Q11 Q12 Q13 Q14 Q15 Q16 Q17 Q18: library part PMMT491A, "NPN BISS Transistor"
Q8 Q9: library part 2N3906, "PNP General Purpose Amplifier"
R1 R2 R3 R4 R5 R6 R7 R8 R9 R10 R11 R12 R13 R14 R15 R16 R17 R18 R19 R20 R21 R22 R23 R24 R25 R26 R27 R28 R29 R30 R31 R32 R35 R36 R37 R38 R39 R40 R41 R42 R43 R44 R45 R46 R47 R48 R49 R50 R51 R52 R53 R54 R55 R56 R57 R58 R59 R60 R61 R62 R63 R64 R65 R66 R67 R68 R69 R70 R71 R72 R73 R74 R75 R76 R77 R78 R79 R80 R81 R82 R83 R84 R85 R86 R87 R88 R89 R90 R91 R92 R93 R94 R95 R96 R97 R98 R99 R100 R101 R102 R103 R104 R105 R106 R107 R108 R110 R111 R112 R113 R114 R115 R116 R117 R118 R119 R120 R121 R122 R123 R124 R125 R126 R127 R128 R129 R130 R131 R132 R133 R134 R135 R136 R137 R138 R139 R140 R141 R142 R143 R144 R145 R146 R147 R148 R149 R150 R151 R152 R153 R154 R155 R156 R157 R158 R159 R160 R161 R162: library part Res1, "Resistor"
RV1: library part RPot-A, "Potentiometer"
S1: "Push Button ,2mm(L)x2mm(W)x10mm(H)"
U4 U28: library part LM1117T-5.0, "800mA Low-Dropout Linear Regulator"
U5: library part CAT24W02, "Serial EEPROM"
U6: library part MAX811-EUS-T, "4-Pin µP Voltage Monitors with Manual Reset Input"
U7 U10 U13: library part LM393AD, "Low-Power Dual Voltage Comparator"
U8 U9 U11 U12 U14 U15 U16 U17 U19 U20 U21 U22 U23: library part Optoisolator1, "4-Pin Phototransistor Optocoupler"
U18: "Low-Power Dual Voltage Comparator"
U24 U25: library part HCPL-2601/2611, "Hight Speed 10Mbit/s Logic Gate Optocoupler"
U26: "CAN controller bus transceiver"
U27: library part MAX232ESE, "+5V Powered, Multi-Channel RS-232 Driver/Receiver"
Y1 Y2: library part XTAL, "Crystal Oscillator"

## Free pads (board coordinates)
  round 6 hole 3.6: 0(11.5,5) 1(11.5,70) 2(136.5,70) 3(136.5,5)
  round 5 hole 2.7: 0(16.5,28.3) 0(18,64.1) 0(94,64.1) 0(95.5,28.3)

## Via types
v1: diameter 0.6, hole 0.3, Top Layer to Bottom Layer, 310 vias

## Nets (pads, with @x,y where several pads share a name; then routed paths per layer and width w, separated by ;. In a path a pad name is that pad's centre, name@x,y a point inside that pad or via, vN(x,y) a via of type N, cw(c..) or ccw(c..) an arc to the next point about the centre after c; other vN are vias at no path point)
3.3V: C5.2 C6.2 C7.2 C8.2 C11.2 C16.2 C18.2 C20.2 C21.2 C39.2 LR1.1 LR2.1 P1.1 P1.2 R2.1 R27.2 R28.2 R29.2 R30.2 R31.2 R32.2 R151.2 R152.2 R153.2 R154.2 R156.2 R157.1 U1.21 U1.42 U1.56 U1.77 U4.2 U5.8 U6.4 U27.16 | length 378.5
  Top Layer w0.254: 34.087,41.681 34.646,41.681 34.673,41.708 U1.21@34.673,42.579 ; 36.173,52.527 U1.77@36.173,55.779 ; 42.469,51.929 U1.56@46.023,51.929 ; v1@42.545,44.929 U1.42@46.023,44.929 ; v1@42.693,44.785 cw(c43.04,44.438) 43.04,44.929 ; v1@42.693,45.03 ccw(c42.936,45.273) 42.936,44.929
  Top Layer w0.508: 1.473,34.341 1.473,24.206 ; 1.473,34.392 1.473,53.162 2.286,53.975 9.55,53.975 10.465,54.889 10.465,57.987 U4.2@10.338,58.114 ; 1.524,35.585 24.308,35.585 24.74,36.017 31.079,36.017 32.487,37.424 32.487,39.98 34.112,41.605 34.112,43.764 35.154,44.806 35.154,51.994 35.687,52.527 42.24,52.527 42.545,52.222 v1@42.545,44.929 ; 1.651,25.908 P1.2@3.613,25.908 P1.1@5.613,25.908 ; P1.2@3.369,25.663 ccw(c2.778,25.073) 2.778,25.908 ccw(c2.778,26.743) P1.2@3.369,26.153 ; P1.2@3.858,25.663 cw(c4.449,25.073) 4.449,25.908 cw(c4.449,26.743) P1.2@3.858,26.153 ; P1.1@5.369,25.663 ccw(c4.778,25.073) 4.778,25.908 ccw(c4.778,26.743) P1.1@5.369,26.153 ; U4.2@10.255,57.38 cw(c9.75,56.874) 10.465,56.874 cw(c11.179,56.874) U4.2@10.674,57.38 ; 10.465,56.21 17.374,56.21 ; C20.2@15.621,1.981 15.662,2.022 17.816,2.022 17.831,2.007 17.831,0.991 18.11,0.711 26.365,0.711 27.178,1.524 U27.16@28.004,1.524 ; C20.2@16.454,1.468 cw(c17.791,0.131) U6.4@17.791,2.022 ; 17.145,12.37 ccw(c18.502,12.37) R2.1@17.542,11.411 ; 17.145,13.596 ccw(c19.728,13.596) R2.1@17.902,11.77 ; C11.2@17.16,54.884 ccw(c16.461,55.583) 17.45,55.583 ; C16.2@17.16,57.41 cw(c16.461,56.71) 17.45,56.71 ; 17.45,55.878 ccw(c18.856,55.878) C11.2@17.862,54.884 ; 17.45,56.416 cw(c18.856,56.416) C16.2@17.862,57.41 ; 17.831,1.58 cw(c18.42,1.58) U6.4@18.003,1.997 ; C11.2@17.862,54.132 cw(c18.708,53.286) 18.708,54.483 cw(c18.708,55.68) C11.2@17.862,54.834 ; C16.2@17.862,57.51 cw(c18.649,56.722) 18.649,57.836 ; C16.2@17.862,58.211 ccw(c18.768,59.117) 18.768,57.836 ; R2.1@17.902,11.089 cw(c18.663,10.328) 18.663,11.405 cw(c18.663,12.481) R2.1@17.902,11.72 ; 19.188,57.836 cw(c19.188,56.552) LR1.1@20.096,57.46 ; 19.31,57.836 ccw(c19.31,58.947) LR1.1@20.096,58.161 ; LR2.1@20.121,54.132 ccw(c19.274,53.286) 19.274,54.483 ccw(c19.274,55.68) LR2.1@20.121,54.834 ; LR1.1@20.396,57.836 17.45,57.836 17.45,54.483 LR2.1@20.422,54.483 ; LR1.1@20.472,57.963 LR1.1@20.498,57.963 ; C21.2@22.88,1.911 cw(c22.193,1.223) 23.165,1.223 ; 23.165,0.787 C21.2@23.165,2.184 ; 23.165,0.905 cw(c24.588,0.905) C21.2@23.582,1.911 ; 23.851,25.857 cw(c25.02,24.688) R156.2@25.02,26.342 ; R156.2@25.044,26.797 27.254,24.587 28.702,24.587 30.861,26.746 R154.2@36.754,26.746 ; R156.2@25.095,26.797 24.79,26.797 22.2,24.206 1.473,24.206 ; R156.2@25.12,26.342 cw(c25.12,25.424) 25.768,26.073 ; R156.2@25.566,26.788 ccw(c26.802,26.788) 25.928,25.914 ; U27.16@28.143,1.524 v1(29.616,1.524) ; 28.674,36.017 ccw(c28.674,40.253) C18.2@31.668,37.258 ; v1@29.591,11.43 v1(29.616,11.43) 39.776,11.43 41.554,9.652 48.946,9.652 49.428,9.169 49.428,5.537 49.022,5.131 U5.8@48.158,5.131 ; v1@29.667,11.405 R2.1@17.586,11.405 17.145,11.846 17.145,15.062 16.104,16.104 2.337,16.104 1.473,16.967 1.473,24.206 ; 29.9,36.017 ccw(c29.9,39.026) C18.2@32.028,36.899 ; 30.062,25.947 cw(c31.014,24.995) R153.2@31.014,26.342 ; R153.2@30.332,26.217 ccw(c29.761,26.788) R153.2@30.568,26.788 ; R153.2@30.865,26.792 R153.2@31.313,26.792 ; 31.087,36.025 cw(c32.019,35.093) C18.2@32.019,36.411 ; 31.126,36.017 ccw(c31.126,37.8) C18.2@32.387,36.539 ; 31.208,36.146 ccw(c30.446,36.907) C18.2@31.523,36.907 ; R153.2@31.43,26.472 cw(c32.091,25.811) 32.091,26.746 ; R153.2@31.43,27.103 ccw(c32.291,27.964) 32.291,26.746 ; C18.2@31.668,37.358 ccw(c29.693,39.333) 32.487,39.333 ; C18.2@32.028,36.999 ccw(c30.92,38.106) 32.487,38.106 ; 32.733,26.746 ccw(c32.733,27.964) R152.2@33.594,27.103 ; 32.933,26.746 cw(c32.933,25.811) R152.2@33.594,26.472 ; R152.2@34.325,26.472 cw(c34.987,25.811) 34.987,26.746 ; R152.2@34.325,27.103 ccw(c35.186,27.964) 35.186,26.746 ; v1@35.122,2.134 cw(c35.122,1.075) C39.2@35.87,1.823 ; 35.526,26.746 ccw(c35.526,27.979) R154.2@36.397,27.107 ; 35.746,26.746 cw(c35.746,25.825) R154.2@36.397,26.476 ; C39.2@35.866,2.52 cw(c34.95,3.411) v1(34.95,2.134) 36.322,2.134 C39.2@36.373,2.184 ; R154.2@36.601,26.899 R154.2@36.754,26.746 ; R154.2@36.813,26.346 cw(c36.813,25.521) R154.2@37.396,26.104 ; R154.2@36.813,27.238 ccw(c36.813,29.264) 38.245,27.831 ; R154.2@37.259,26.792 ccw(c38.587,26.792) 37.648,25.852 ; 38.184,27.77 cw(c39.574,26.38) R27.2@39.574,28.346 ; R27.2@39.065,28.651 37.16,26.746 R154.2@36.754,26.746 ; R28.2@42.545,28.792 43.917,28.792 ; 42.547,9.652 ccw(c42.547,11.108) R151.2@43.577,10.078 ; R28.2@42.91,28.476 cw(c43.672,27.715) 43.672,28.792 cw(c43.672,29.869) R28.2@42.91,29.107 ; 43.083,9.652 cw(c43.083,8.954) R151.2@43.577,9.448 ; R151.2@44.307,9.448 cw(c44.801,8.954) 44.801,9.652 ; R151.2@44.307,10.078 ccw(c45.337,11.108) 45.337,9.652 ; R29.2@45.177,28.476 ccw(c44.415,27.715) 44.415,28.792 ccw(c44.415,29.869) R29.2@45.177,29.107 ; R29.2@45.452,28.792 43.917,28.792 ; R29.2@45.695,28.792 R31.2@51.41,28.792 R31.2@51.472,28.792 ; R29.2@45.908,28.476 cw(c46.669,27.715) 46.669,28.792 cw(c46.669,29.869) R29.2@45.908,29.107 ; 46.002,9.652 ccw(c46.002,11.108) R157.1@47.031,10.078 ; 46.538,9.652 cw(c46.538,8.954) R157.1@47.031,9.448 ; R157.1@47.762,9.448 cw(c48.255,8.954) 48.255,9.652 ; R157.1@47.762,10.078 ccw(c48.791,11.108) 48.791,9.652 ; R30.2@48.123,28.476 ccw(c47.362,27.715) 47.362,28.792 ccw(c47.362,29.869) R30.2@48.123,29.107 ; R30.2@48.854,28.476 cw(c49.615,27.715) 49.615,28.792 cw(c49.615,29.869) R30.2@48.854,29.107 ; U5.8@48.859,5.189 ccw(c47.484,6.564) 49.428,6.564 ; U5.8@48.891,5.202 ccw(c48.891,5.69) 49.236,5.345 ; R31.2@51.044,28.476 ccw(c50.283,27.715) 50.283,28.792 ccw(c50.283,29.869) R31.2@51.044,29.107 ; R31.2@51.183,28.778 R32.2@53.924,28.778 ; R31.2@51.775,28.476 cw(c52.503,27.748) 52.503,28.778 ; R31.2@51.775,29.107 ccw(c52.569,29.901) 52.569,28.778 ; 53.222,28.778 ccw(c53.222,29.901) R32.2@54.016,29.107 ; 53.288,28.778 cw(c53.288,27.748) R32.2@54.016,28.476 ; R154.2@36.754,26.746 38.913,24.587 42.875,24.587 43.917,25.629 43.917,28.792
  Bottom Layer w0.508: v1(29.616,1.524) v1(29.616,11.43) ; 29.616,2.134 v1(34.95,2.134)
  other v1: 42.57,44.907 35.128,45.466 42.57,51.054 37.592,52.553
5V: C10.2 C12.2 C23.2 C24.1 P2.1 P2.17 P3.10 Q8.2 Q9.2 R3.1 R5.1 R6.1 R7.1 R8.1 R9.1 R10.1 R11.1 R12.1 R15.1 R16.1 R17.1 R18.1 R25.1 R26.1 R54.2 R55.2 R56.1 R75.1 R76.1 R77.2 R78.2 R97.1 R98.1 R99.2 R100.2 R124.1 R125.1 R129.1 R132.1 R136.1 R139.1 R140.2 R141.1 R159.1 R161.1 R162.1 U4.3 U25.8 | length 454.5
  Top Layer w0.508: U4.3@12.556,58.848 ccw(c11.532,59.872) 12.979,59.872 ; U4.3@12.638,58.114 12.979,58.456 12.979,64.846 15.418,67.285 22.504,67.285 23.8,65.989 P2.1@23.851,65.989 ; C12.2@15.829,70.099 cw(c14.982,69.252) 16.18,69.252 cw(c17.377,69.252) C12.2@16.531,70.099 ; 16.18,67.335 16.18,70.46 16.637,70.917 17.526,70.917 ; C12.2@16.218,70.453 cw(c16.842,70.265) C12.2@16.842,70.917 ; C12.2@16.705,70.306 cw(c17.526,70.059) 17.526,70.917 ; C10.2@19.781,71.999 cw(c20.726,71.054) 20.726,72.39 ; C10.2@19.781,72.7 ccw(c20.53,73.449) 20.53,72.39 ; 21.489,72.39 cw(c21.489,71.054) C23.2@22.434,71.999 ; 21.685,72.39 ccw(c21.685,73.449) C23.2@22.434,72.7 ; C23.2@22.809,72.39 18.999,72.39 17.526,70.917 ; C23.2@22.86,72.365 26.238,72.365 27.889,74.016 33.401,74.016 35.038,72.378 R7.1@37.695,72.378 R8.1@40.489,72.378 R9.1@43.283,72.378 R10.1@46.077,72.378 R11.1@48.871,72.378 R12.1@51.665,72.378 R15.1@54.459,72.378 R16.1@57.253,72.378 R17.1@60.047,72.378 R18.1@62.841,72.378 R25.1@65.635,72.378 R26.1@68.238,72.378 ; 22.934,66.855 ccw(c23.8,67.72) P2.1@23.8,66.496 ; 22.961,66.828 cw(c22.133,66) P2.1@23.304,66 ; C23.2@23.235,71.999 cw(c24.119,71.115) 24.119,72.365 ; C23.2@23.235,72.7 ccw(c24.045,73.51) 24.045,72.365 ; P2.1@23.622,66.015 P2.1@23.8,65.837 ; 24.878,72.365 cw(c24.878,71.115) C24.1@25.761,71.999 ; 24.951,72.365 ccw(c24.951,73.51) C24.1@25.761,72.7 ; C24.1@26.212,72.845 ccw(c26.212,74.069) 27.077,73.204 ; C24.1@26.708,72.349 cw(c27.879,72.349) 27.051,73.177 ; 33.958,73.459 cw(c32.877,72.378) R5.1@34.405,72.378 ; R5.1@34.409,73.007 ccw(c34.851,73.449) R5.1@34.851,72.824 ; R5.1@35.267,72.063 cw(c36.028,71.301) 36.028,72.378 cw(c36.028,73.455) R5.1@35.267,72.694 ; R7.1@37.33,72.063 ccw(c36.569,71.301) 36.569,72.378 ccw(c36.569,73.455) R7.1@37.33,72.694 ; R7.1@38.061,72.063 cw(c38.822,71.301) 38.822,72.378 cw(c38.822,73.455) R7.1@38.061,72.694 ; R8.1@40.124,72.063 ccw(c39.363,71.301) 39.363,72.378 ccw(c39.363,73.455) R8.1@40.124,72.694 ; R8.1@40.855,72.063 cw(c41.616,71.301) 41.616,72.378 cw(c41.616,73.455) R8.1@40.855,72.694 ; R9.1@42.918,72.063 ccw(c42.157,71.301) 42.157,72.378 ccw(c42.157,73.455) R9.1@42.918,72.694 ; R9.1@43.649,72.063 cw(c44.41,71.301) 44.41,72.378 cw(c44.41,73.455) R9.1@43.649,72.694 ; R10.1@45.712,72.063 ccw(c44.951,71.301) 44.951,72.378 ccw(c44.951,73.455) R10.1@45.712,72.694 ; R10.1@46.443,72.063 cw(c47.204,71.301) 47.204,72.378 cw(c47.204,73.455) R10.1@46.443,72.694 ; R11.1@48.506,72.063 ccw(c47.745,71.301) 47.745,72.378 ccw(c47.745,73.455) R11.1@48.506,72.694 ; R11.1@49.237,72.063 cw(c49.998,71.301) 49.998,72.378 cw(c49.998,73.455) R11.1@49.237,72.694 ; R12.1@51.3,72.063 ccw(c50.539,71.301) 50.539,72.378 ccw(c50.539,73.455) R12.1@51.3,72.694 ; R12.1@52.031,72.063 cw(c52.792,71.301) 52.792,72.378 cw(c52.792,73.455) R12.1@52.031,72.694 ; R15.1@54.094,72.063 ccw(c53.333,71.301) 53.333,72.378 ccw(c53.333,73.455) R15.1@54.094,72.694 ; R15.1@54.825,72.063 cw(c55.586,71.301) 55.586,72.378 cw(c55.586,73.455) R15.1@54.825,72.694 ; R16.1@56.888,72.063 ccw(c56.127,71.301) 56.127,72.378 ccw(c56.127,73.455) R16.1@56.888,72.694 ; R16.1@57.619,72.063 cw(c58.38,71.301) 58.38,72.378 cw(c58.38,73.455) R16.1@57.619,72.694 ; R17.1@59.682,72.063 ccw(c58.921,71.301) 58.921,72.378 ccw(c58.921,73.455) R17.1@59.682,72.694 ; R17.1@60.413,72.063 cw(c61.174,71.301) 61.174,72.378 cw(c61.174,73.455) R17.1@60.413,72.694 ; R97.1@60.555,35.294 64.821,35.294 cw(c64.821,36.3) R99.2@63.994,35.726 ; R98.1@60.895,28.476 cw(c61.473,27.899) 61.473,28.716 ; R98.1@60.895,29.107 ccw(c61.841,30.053) 61.841,28.716 ; R97.1@60.895,35.787 ccw(c62.086,36.978) 62.086,35.294 ; R76.1@60.895,41.507 cw(c61.411,40.991) 61.411,41.72 ; R76.1@60.895,42.137 ccw(c61.902,43.144) 61.902,41.72 ; R75.1@60.895,47.603 cw(c61.411,47.087) 61.411,47.816 ; R75.1@60.895,48.233 ccw(c61.902,49.24) 61.902,47.816 ; R56.1@60.895,59.261 cw(c61.657,58.5) 61.657,59.577 cw(c61.657,60.653) R56.1@60.895,59.892 ; R98.1@61.114,28.716 R100.2@63.654,28.716 ; R76.1@61.165,41.72 63.797,41.72 63.86,41.783 v1@65.97,41.783 ; R75.1@61.165,47.816 R77.2@63.578,47.816 ; R56.1@61.19,59.577 R54.2@63.578,59.577 v1@65.938,59.577 ; v1@61.265,53.34 62.103,53.34 63.285,54.522 v1@65.977,54.522 ; 62.022,35.294 ccw(c62.022,36.978) R99.2@63.213,35.787 ; 62.206,41.72 ccw(c62.206,43.144) R78.2@63.213,42.137 ; 62.206,47.816 ccw(c62.206,49.24) R77.2@63.213,48.233 ; 62.267,28.716 ccw(c62.267,30.053) R100.2@63.213,29.107 ; 62.352,53.589 cw(c63.528,52.413) R55.2@63.528,54.076 ; R18.1@62.476,72.063 ccw(c61.715,71.301) 61.715,72.378 ccw(c61.715,73.455) R18.1@62.476,72.694 ; 62.635,28.716 cw(c62.635,27.899) R100.2@63.213,28.476 ; 62.697,41.72 cw(c62.697,40.991) R78.2@63.213,41.507 ; 62.697,47.816 cw(c62.697,47.087) R77.2@63.213,47.603 ; R18.1@63.207,72.063 cw(c63.968,71.301) 63.968,72.378 cw(c63.968,73.455) R18.1@63.207,72.694 ; R54.2@63.213,59.261 ccw(c62.451,58.5) 62.451,59.577 ccw(c62.451,60.653) R54.2@63.213,59.892 ; R100.2@63.578,28.792 R100.2@63.654,28.716 ; R77.2@63.709,47.479 cw(c63.909,46.386) 64.696,47.172 ; R77.2@63.832,47.664 R77.2@63.578,47.918 63.95,47.918 64.696,47.172 ; R77.2@63.924,47.816 R77.2@63.984,47.877 ; R78.2@63.943,41.507 cw(c64.611,40.839) 64.611,41.783 ; R78.2@63.943,42.137 ccw(c64.799,42.993) 64.799,41.783 ; R55.2@63.943,54.207 cw(c64.705,53.445) 64.705,54.522 cw(c64.705,55.599) R55.2@63.943,54.837 ; R54.2@63.943,59.261 cw(c64.705,58.5) 64.705,59.577 cw(c64.705,60.653) R54.2@63.943,59.892 ; R100.2@64.021,29.003 ccw(c64.948,29.5) 64.948,28.448 63.922,28.448 R100.2@63.654,28.716 ; P2.17@64.186,66.294 P2.17@64.719,66.294 ; R25.1@65.27,72.063 ccw(c64.509,71.301) 64.509,72.378 ccw(c64.509,73.455) R25.1@65.27,72.694 ; v1(65.966,47.172) 64.696,47.172 ; R25.1@66.001,72.063 cw(c66.762,71.301) 66.762,72.378 cw(c66.762,73.455) R25.1@66.001,72.694 ; v1@66.37,23.419 68.586,23.419 74.994,17.011 109.39,17.011 109.398,17.018 ; R26.1@68.064,72.063 ccw(c67.303,71.301) 67.303,72.378 ccw(c67.303,73.455) R26.1@68.064,72.694 ; R140.2@109.022,22.063 cw(c108.077,21.118) 109.414,21.118 ; R159.1@109.048,18.989 cw(c108.164,18.105) 109.414,18.105 ; R159.1@109.048,19.72 ccw(c108.164,20.604) 109.414,20.604 ; R141.1@109.098,13.421 ccw(c108.337,14.182) 109.414,14.182 ccw(c110.491,14.182) R141.1@109.729,13.421 ; R139.1@109.124,15.687 cw(c108.424,14.987) 109.414,14.987 ; R139.1@109.124,16.418 ccw(c108.424,17.118) 109.414,17.118 ; 109.414,14.865 cw(c110.577,14.865) R139.1@109.755,15.687 ; 109.414,17.241 ccw(c110.577,17.241) R139.1@109.755,16.418 ; 109.414,18.351 cw(c110.317,18.351) R159.1@109.678,18.989 ; 109.414,20.359 ccw(c110.317,20.359) R159.1@109.678,19.72 ; 109.414,21.485 cw(c110.23,21.485) R140.2@109.653,22.063 ; R140.2@109.414,22.387 109.414,12.633 112.725,9.322 112.725,5.359 113.335,4.75 115.646,4.75 U25.8@115.697,4.699 ; R141.1@109.86,13.006 ccw(c111.836,13.006) 110.438,11.609 ; 113.585,4.75 cw(c113.585,3.137) U25.8@114.726,4.278 ; 113.831,4.75 ccw(c113.831,6.015) U25.8@114.726,5.12 ; U25.8@115.722,4.674 116.357,4.674 118.643,2.388 132.334,2.388 132.664,2.718 132.664,6.579 135.179,9.093 138.975,9.093 R162.1@139.192,9.311 ; U25.8@116.247,4.103 cw(c116.247,2.459) 117.41,3.621 ; U25.8@116.843,4.699 ccw(c118.077,4.699) 117.204,3.827 ; 137.54,9.093 ccw(c137.54,10.912) R162.1@138.827,9.626 ; R162.1@139.206,9.311 R161.1@142.113,9.311 ; R162.1@139.557,8.995 cw(c140.319,8.234) 140.319,9.311 cw(c140.319,10.387) R162.1@139.557,9.626 ; 140.931,9.311 ccw(c140.931,10.393) R161.1@141.697,9.628 ; 140.94,9.311 cw(c140.94,8.24) R161.1@141.697,8.997 ; R161.1@142.088,9.271 145.618,9.271 145.923,9.576 145.923,36.093 P3.10@143.98,38.036 ; R161.1@142.088,9.322 R161.1@142.494,9.728 ; R161.1@142.428,8.997 cw(c143.089,8.336) 143.089,9.271 ; R161.1@142.428,9.628 ccw(c143.289,10.489) 143.289,9.271 ; P3.10@144,37.504 cw(c144,36.267) 144.875,37.142 ; P3.10@144.496,38 ccw(c145.654,38) 144.835,37.181
  Bottom Layer w0.508: R6.1@56.836,53.17 ccw(c57.775,54.109) 57.775,52.781 ; R6.1@56.845,53.213 57.277,52.781 Q9.2@61.214,52.781 ; R3.1@56.88,63.437 ccw(c56.88,64.857) 57.884,63.853 ; R3.1@56.921,62.89 58.217,64.186 62.662,64.186 P2.17@64.516,66.04 ; R6.1@57.195,53.529 ccw(c59.001,55.335) 59.001,52.781 ; R3.1@57.326,62.991 cw(c58.059,62.991) R3.1@57.541,63.51 ; v1@61.253,53.313 cw(c60.926,53.07) Q9.2@61.214,52.781 ; Q9.2@61.265,52.832 Q9.2@61.214,52.781 ; v1@61.29,53.365 Q9.2@61.299,52.808 ; Q8.2@61.595,58.903 61.62,58.928 v1(61.62,59.563) ; 61.62,59.245 ccw(c62.002,59.245) Q8.2@61.732,58.976 ; 63.568,65.092 ccw(c62.66,66) P2.17@63.944,66 ; 63.655,65.179 cw(c64.44,64.393) 64.44,65.504 cw(c64.44,64.272) 65.311,65.143 ; R132.1@63.829,33.76 ccw(c63.029,35.306) v1(64.77,35.306) 64.77,33.62 ; R132.1@63.984,33.364 63.729,33.62 64.77,33.62 ; R125.1@63.984,38.698 65.961,38.698 ; R129.1@63.984,44.022 65.915,44.022 ; R129.1@63.984,44.032 R129.1@63.994,44.022 ; R124.1@63.984,49.636 65.94,49.636 ; R136.1@63.988,27.303 ccw(c64.778,28.008) 64.778,26.949 ; R132.1@64.01,33.364 65.961,33.364 ; R136.1@64.034,27.79 ccw(c64.034,28.407) R136.1@64.47,27.971 ; R132.1@64.063,33.309 ccw(c63.461,34.471) 64.77,34.471 ; P2.17@64.089,66.351 ccw(c63.243,67.197) 64.44,67.197 ccw(c65.637,67.197) P2.17@64.791,66.351 ; R132.1@64.296,32.858 ccw(c63.894,33.636) 64.77,33.636 ; R132.1@64.35,33.048 cw(c65.111,32.287) 65.111,33.364 cw(c65.111,34.441) R132.1@64.35,33.679 ; R125.1@64.35,38.382 cw(c65.111,37.621) 65.111,38.698 cw(c65.111,39.775) R125.1@64.35,39.013 ; R129.1@64.35,43.716 cw(c65.088,42.978) 65.088,44.022 ; R129.1@64.35,44.347 ccw(c65.134,45.131) 65.134,44.022 ; R124.1@64.35,49.304 cw(c65.15,48.504) 65.15,49.636 ; R124.1@64.35,49.935 ccw(c65.073,50.658) 65.073,49.636 ; R136.1@64.367,27.641 ccw(c65.913,29.023) 65.913,26.949 ; P2.17@64.44,66 P2.17@64.44,66.015 ; v1@64.44,72.365 P2.17@64.44,66.015 ; R132.1@64.48,33.343 cw(c64.77,33.329) 64.77,33.62 ; R136.1@64.48,27.344 cw(c66.017,27.344) v1@64.931,28.431 ; P2.17@64.936,66 ccw(c66.099,66) 65.277,65.178 ; v1@66.37,23.419 66.37,26.492 65.913,26.949 64.006,26.949 64.006,27.506 66.878,30.378 66.878,32.106 65.964,33.02 65.964,33.392 65.961,33.395 65.961,41.25 65.966,41.254 v1(65.966,47.172) 65.966,62.308 65.964,62.31 65.964,64.491 P2.17@64.44,66.015
  other v1: 66.396,23.419 64.948,28.473 65.964,41.783 61.29,53.34 65.964,54.559 65.938,59.563 64.414,72.365
5VA: C42.2 C43.2 R142.1 R143.2 R144.1 U24.8 U26.3 U28.2 | length 73.8
  Top Layer w0.508: U28.2@126.206,35.231 cw(c125.763,34.787) 126.39,34.787 ; 126.39,34.664 cw(c127.192,34.664) U28.2@126.625,35.231 ; U28.2@126.39,35.839 126.39,34.214 126.619,33.985 130.759,33.985 131.572,34.798 131.572,39.7 C42.2@131.623,39.751 ; U24.8@126.644,22.301 126.619,22.276 126.543,22.276 126.543,22.377 126.568,22.403 v1(128.397,22.403) ; U24.8@126.905,21.905 cw(c128.106,20.704) v1@128.106,22.403 ; U24.8@126.905,22.748 ccw(c127.738,23.582) 127.738,22.403 ; 128.095,22.4 cw(c128.19,22.044) v1@128.374,22.363 ; v1@128.448,14.757 U26.3@130.039,14.757 132.69,14.757 ; 131.572,34.739 cw(c133.829,34.739) C43.2@132.387,36.475 ; 131.572,35.821 cw(c132.93,35.821) C43.2@132.062,36.865 ; C43.2@131.572,37.49 cw(c134.382,37.49) C42.2@132.395,39.477 ; 131.572,38.129 ccw(c133.243,38.129) C43.2@132.061,36.948 ; 131.572,38.716 cw(c133.156,38.716) C42.2@132.036,39.836 ; C42.2@131.572,39.355 ccw(c134.469,39.355) C43.2@132.421,37.307 ; R143.2@131.607,10.351 ccw(c131.607,11.526) 132.437,10.695 ; R143.2@131.978,9.728 131.978,10.236 132.74,10.998 132.74,17.551 134.112,18.923 ; R143.2@132.053,9.905 cw(c133.032,9.905) 132.339,10.597 ; R144.1@133.806,19.675 cw(c133.067,18.937) 134.112,18.937 ; R144.1@133.806,20.406 ccw(c133.067,21.145) 134.112,21.145 ; R142.1@133.806,22.977 cw(c133.067,22.239) 134.112,22.239 ; 134.112,21.19 ccw(c135.221,21.19) R144.1@134.437,20.406 ; 134.112,22.193 cw(c135.221,22.193) R142.1@134.437,22.977 ; R142.1@134.112,23.343 134.112,18.923 ; R144.1@134.43,19.669 ccw(c135.145,18.923) 134.112,18.923
  Bottom Layer w0.508: v1@128.397,14.757 128.397,22.454 130.759,24.816 v1@130.759,33.96
  other v1: 128.422,14.757 130.734,33.985